# Altium PCB PCB_Akira_f1_2024-01-05.pcbdoc
Units mil, origin at the board's own origin, x right, y up, seen from the top; angles counter-clockwise.
Board outline 6211.95 x 3204.4 mil, 2 copper layers (Top Layer, Bottom Layer); 54 components, 46 nets, 217 pads, 53 vias.
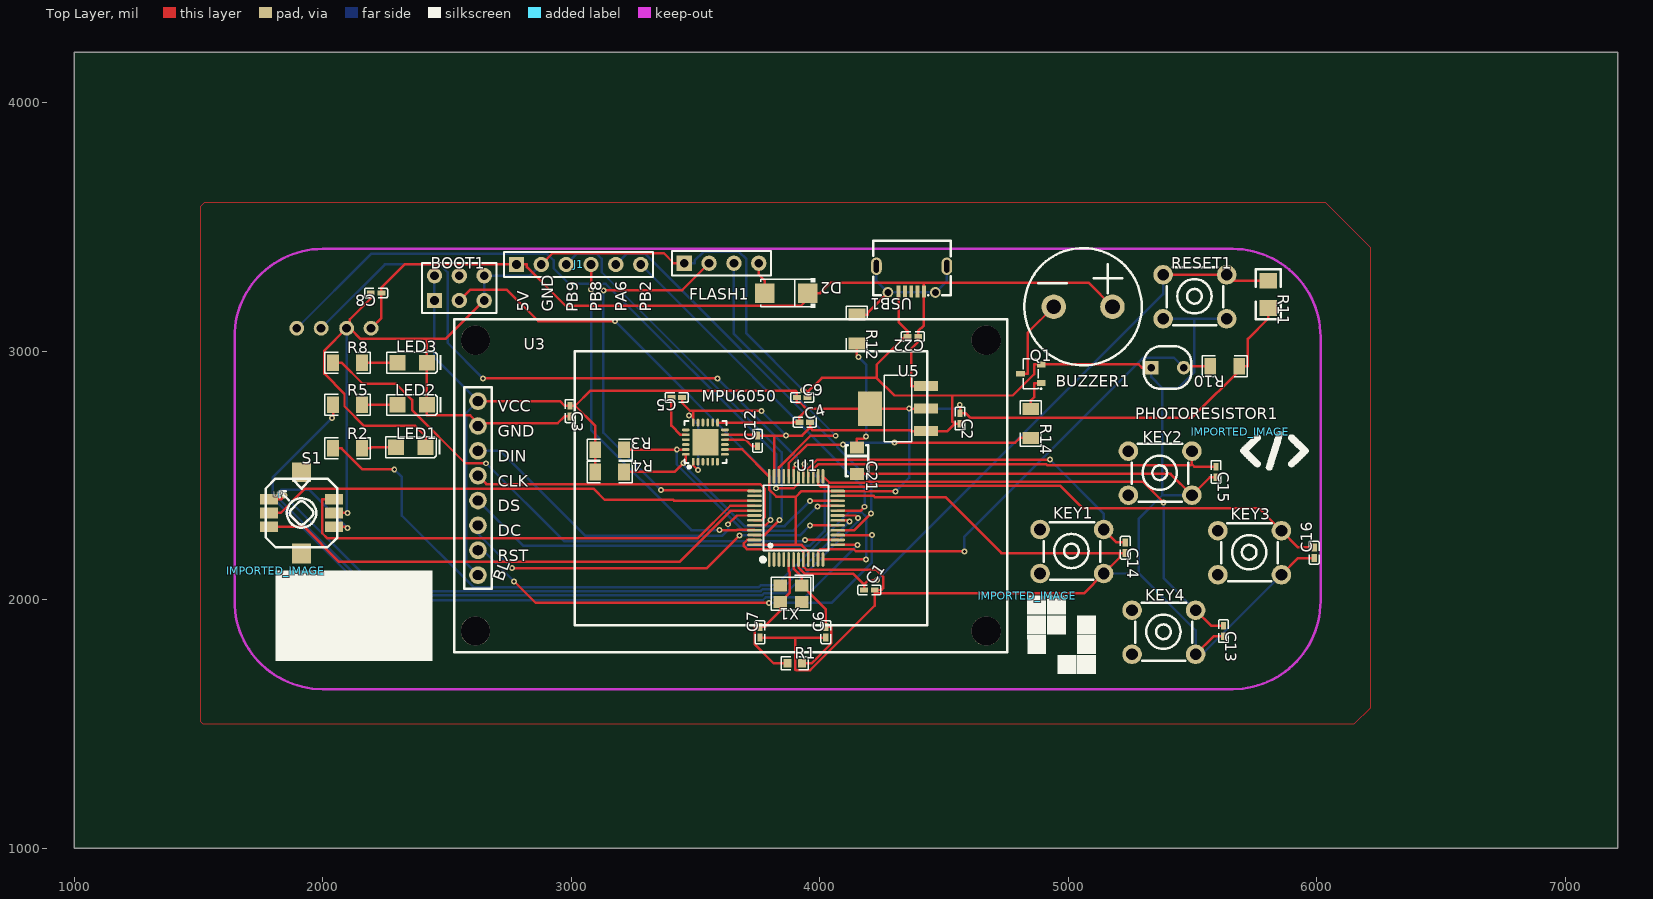
[diagram p0: Top Layer view]
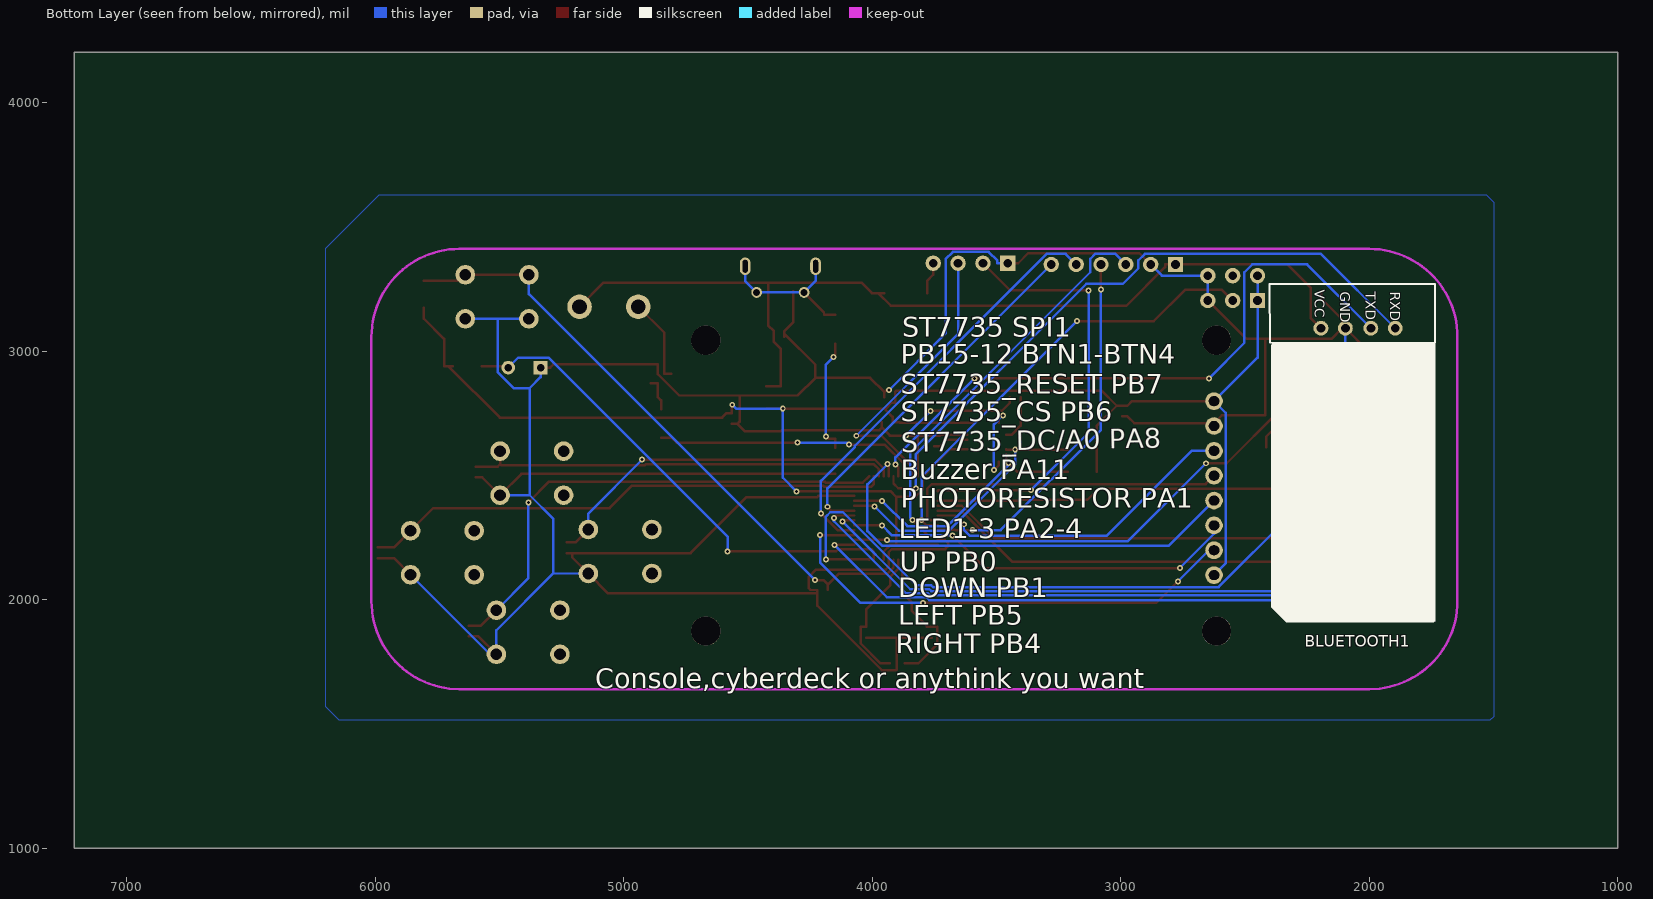
[diagram p1: Bottom Layer view, seen from below]

## Layer stack, top to bottom
Top Layer: signal copper (thickness not stored)
Dielectric: dielectric 12.6, FR-4, Dk 4.8
Bottom Layer: signal copper (thickness not stored)

## Board outline
7211.95,1000 1000,1000 1000,4204.4 7211.95,4204.4

## Components (designator, comment, footprint, x,y, rotation, side; value= is the part's Value field where it differs from the comment)
BLUETOOTH1 "HC06" HC06 1735,3035 r180 bottom
BOOT1 "2.54mm2*3P" HDR-3X2/2.54 2450,3205 r0 top
BUZZER1 "BUZZER" BUZ-TH_BD12.0-P6.00-D0.9-RD 5060,3180 r0 top
C1 "100nF" C0402#1 4200,2040 r0 top
C2 "100nF" C0402#1 4565,2730 r270 top
C3 "100nF" C0402#1 2995,2760 r270 top
C4 "100nF" C0402#1 3940,2715 r0 top
C5 "220nF" C0402#1 3424.99,2814.97 r180 top
C6 "27pF" C0402#1 4025,1870 r90 top
C7 "27pF" C0402#1 3760,1870 r90 top
C8 "10uF" C0402#1 2215,3235 r180 top
C9 "22uF" C0402#1 3930,2815 r0 top
C12 "100nF" C0402#1 3749.99,2639.97 r90 top
C13 "100nF" C0402#1 5625,1875 r270 top
C14 "100nF" C0402#1 5230,2210 r270 top
C15 "100nF" C0402#1 5595,2515 r270 top
C16 "100nF" C0402#1 5990,2190 r90 top
C21 "100nF" C0402#2 4150,2560 r270 top
C22 "100nF" C0402#1 4375,3060 r180 top
D2 "1N4007_C2892673" SMA_L4.3-W2.6-LS5.1-R-RD 3865,3235 r180 top
FLASH1 "Headers  Pins 1*4P" HDR-4X1/2.54 3555,3355 r0 top
IMPORTED_IMAGE "IMPORTED_IMAGE" IMPORTED_IMAGE 1811.5,2116.9 r0 top
IMPORTED_IMAGE "IMPORTED_IMAGE" IMPORTED_IMAGE 5692.25,2677.62 r0 top
IMPORTED_IMAGE "IMPORTED_IMAGE" IMPORTED_IMAGE 4836.16,2016.7 r0 top
J1 "HDR-M-2.54_1x6" HDR-M-2.54_1X6 3030,3350 r0 top
KEY1 "button6*6*8.5" KEY-TH_4P-L6.0-W6.0-P4.50 5015,2195 r0 top
KEY2 "button6*6*8.5" KEY-TH_4P-L6.0-W6.0-P4.50 5370,2510 r0 top
KEY3 "button6*6*8.5" KEY-TH_4P-L6.0-W6.0-P4.50 5730,2190 r0 top
KEY4 "button6*6*8.5" KEY-TH_4P-L6.0-W6.0-P4.50 5385,1870 r0 top
LED1 "11-21/G6C-BQ2R2B/2T" LED1206-RD 2355,2615 r180 top
LED2 "11-21/G6C-BQ2R2B/2T" LED1206-RD 2360,2785 r180 top
LED3 "11-21/G6C-BQ2R2B/2T" LED1206-RD 2360,2955 r180 top
MPU6050 "MPU6050-YJLTY" QFN-24_L4.0-W4.0-P0.50-BL-EP2.7 3540,2635 r0 top
PHOTORESISTOR1 "Photoresistor-5528" SNR2-3.0 5400,2935 r0 top
Q1 "MMBT2222A_C466638" SOT-23-3_L2.9-W1.4-P1.90-LS2.6-BR 4850,2910 r0 top
R1 "1M" R0603 3900,1745 r0 top
R2 "220Ω" R1206 2100,2610 r0 top
R3 "4.7kΩ" R1206 3154.99,2604.97 r180 top
R4 "4.7kΩ" R1206 3154.99,2514.97 r180 top
R5 "220Ω" R1206 2100,2785 r0 top
R8 "220Ω" R1206 2100,2955 r0 top
R10 "100kΩ" R1206 5630,2940 r180 top
R11 "10k" 1206 5805,3230 r270 top
R12 "4.7kΩ" R1206 4150,3090 r270 top
R14 "470Ω" R1206 4850,2710 r270 top
RESET1 "button6*6*8.5" KEY-TH_4P-L6.0-W6.0-P4.50 5510,3220 r0 top
S1 "JOYSTICK_MINI" JOYSTICK_MINI 1915,2350 r0 top
U1 "STM32F103C8T6" LQFP-48_L7.0-W7.0-P0.50-LS9.0-BL 3905,2330 r0 top
U3 "1.8inch LCD TFT ST7735S Waveshare" "1.8 LCD TFT ST7735S WAVESHARE" 2530,1790 r0 top
U5 "LM1117MPX-25NOPB" SOT-223_L6.5-W3.5-P2.30-LS7.0-BR 4315,2770 r0 top
USB1 "USB-111FD-B-SU" USB-SMD_USB-111FD-B-SU 4370,3290 r180 top
X1 "XTAL4-3.2X2.5 8MHz" CRYSTAL-SMD_4P-L3.2-W2.5-BL 3885,2025 r180 top
? "" ? 3820,3156.2 r0 top
? "" ? 5712.47,2530 r0 top

## Footprints (in the part's own frame and the unit in brackets; to place one, negate y for a bottom-side part, rotate by r counter-clockwise, add the part's x,y. Pads: shape width x height; smd on the part's side, far side on the other; paste and mask are expansions set on the pad)
"1.8 LCD TFT ST7735S WAVESHARE" [mm]
  round 1.8 hole 1 slot 1.05 at 0 deg: 1(2.413,7.874) 2(2.413,10.414) 3(2.413,12.954) 4(2.413,15.494) 5(2.413,18.034) 6(2.413,20.574) 7(2.413,23.114) 8(2.413,25.654)
  round 3 hole 3 unplated: ""(2.159,2.159) ""(2.159,31.877) ""(54.356,2.159) ""(54.356,31.877)
  silkscreen extent 0,0 56.5,34
1206 [mil]
  rect 63x70.9 smd: 1(-55,0) 2(55,0)
  silkscreen extent -100,-50 100,50
BUZ-TH_BD12.0-P6.00-D0.9-RD [mm]
  round 2.5 hole 1.5: 1(-3,0) 2(3,0)
  silkscreen extent -5.99,-5.99 5.99,5.99
C0402#1 [mm]
  rect 0.79x0.54 smd: 1(-0.545,0) 2(0.545,0)
  silkscreen extent -1.17,-0.5 1.17,0.5
C0402#2 [mm]
  rect 1.2x1.4 smd: 1(-1.35,0) 2(1.35,0)
  silkscreen extent -1.6,-1.14 1.6,1.14
CRYSTAL-SMD_4P-L3.2-W2.5-BL [mm]
  rect 1.4x1.2 smd: 1(-1.1,-0.85) 2(1.1,-0.85) 3(1.1,0.85) 4(-1.1,0.85)
  silkscreen extent -2.26,-1.91 2.03,1.68
HC06 [mil]
  round 60 hole 36: 1(-460,58.4) 2(-361.6,58.4) 3(-259.2,58.4) 4(-160.8,58.4)
  silkscreen extent -666,0 0,236
HDR-3X2/2.54 [mil]
  rect 62x62 hole 35: 1(0,0)
  round 62 hole 35: 2(0,100) 3(100,0) 4(100,100) 5(200,0) 6(200,100)
  silkscreen extent -50,-50 250,150
HDR-4X1/2.54 [mil]
  rect 62x62 hole 35: 1(-100,0)
  round 62 hole 35: 2(0,0) 3(100,0) 4(200,0)
  silkscreen extent -150,-50 250,50
HDR-M-2.54_1X6 [mil]
  rect 62x62 hole 35: 1(-250,0)
  round 62 hole 35: 2(-150,0) 3(-50,0) 4(50,0) 5(150,0) 6(250,0)
  silkscreen extent -300,-50 300,50
IMPORTED_IMAGE [mil]
  silkscreen extent 0,-361 630,0
JOYSTICK_MINI [mil]
  rect 72.8x43.3 smd: A(-131,55) B(131,55) C(-131,-55) CTR(-131,0) D(131,-55) GND(131,0)
  rect 74.8x78.7 smd: NC(0,163) NC@0(0,-163)
  silkscreen extent -144,-138 144,138
KEY-TH_4P-L6.0-W6.0-P4.50 [mm]
  round 2 hole 1.2: 1(-3.25,-2.25) 2(3.25,-2.25) 3(3.25,2.25) 4(-3.25,2.25)
  silkscreen extent -2.9,-2.9 2.9,3
LED1206-RD [mm]
  rect 1.635x1.6 smd: 1(-1.517,0) 2(1.517,0)
  silkscreen extent -2.99,-1.04 2.57,1.07
LQFP-48_L7.0-W7.0-P0.50-LS9.0-BL [mm]
  oval 0.27x1.5 smd: 1(-2.75,-4.25) 2(-2.25,-4.25) 3(-1.75,-4.25) 4(-1.25,-4.25) 5(-0.75,-4.25) 6(-0.25,-4.25) 7(0.25,-4.25) 8(0.75,-4.25) 9(1.25,-4.25) 10(1.75,-4.25) 11(2.25,-4.25) 12(2.75,-4.25) 25(2.75,4.25) 26(2.25,4.25) 27(1.75,4.25) 28(1.25,4.25) 29(0.75,4.25) 30(0.25,4.25) 31(-0.25,4.25) 32(-0.75,4.25) 33(-1.25,4.25) 34(-1.75,4.25) 35(-2.25,4.25) 36(-2.75,4.25)
  oval 1.5x0.27 smd: 13(4.25,-2.75) 14(4.25,-2.25) 15(4.25,-1.75) 16(4.25,-1.25) 17(4.25,-0.75) 18(4.25,-0.25) 19(4.25,0.25) 20(4.25,0.75) 21(4.25,1.25) 22(4.25,1.75) 23(4.25,2.25) 24(4.25,2.75) 37(-4.25,2.75) 38(-4.25,2.25) 39(-4.25,1.75) 40(-4.25,1.25) 41(-4.25,0.75) 42(-4.25,0.25) 43(-4.25,-0.25) 44(-4.25,-0.75) 45(-4.25,-1.25) 46(-4.25,-1.75) 47(-4.25,-2.25) 48(-4.25,-2.75)
  silkscreen extent -3.59,-4.46 3.3,3.34
QFN-24_L4.0-W4.0-P0.50-BL-EP2.7 [mm]
  oval 0.28x0.8 smd: 1(-1.25,-2) 2(-0.75,-2) 3(-0.25,-2) 4(0.25,-2) 5(0.75,-2) 6(1.25,-2) 13(1.25,2) 14(0.75,2) 15(0.25,2) 16(-0.25,2) 17(-0.75,2) 18(-1.242,2)
  oval 0.8x0.28 smd: 7(2,-1.25) 8(2,-0.75) 9(2,-0.25) 10(2,0.25) 11(2,0.75) 12(2,1.25) 19(-2,1.25) 20(-2,0.75) 21(-2,0.25) 22(-2,-0.25) 23(-2,-0.75) 24(-2,-1.25)
  rect 2.7x2.7 smd: 25(0.012,0)
  silkscreen extent -2.14,-2.79 2.16,2.15
R0603 [mil]
  rect 31.75x34.02 smd: 1(-29.66,0) 2(29.66,0)
  silkscreen extent -55,-26 55,26
R1206 [mil]
  rect 47.54x66.97 smd: 1(-58.22,0) 2(58.22,0)
  silkscreen extent -91,-42 91,42
SMA_L4.3-W2.6-LS5.1-R-RD [mm]
  rect 2x2 smd: 1(2.2,0) 2(-2.2,0)
  silkscreen extent -2.98,-1.5 2.6,1.5
SNR2-3.0 [mil]
  rect 55x55 hole 30: 1(-65,0)
  round 55 hole 30: 2(65,0)
  silkscreen extent -96,-86 96,86
SOT-23-3_L2.9-W1.4-P1.90-LS2.6-BR [mm]
  rect 0.91x0.6 smd: 1(1.055,-0.955) 2(1.055,0.955) 3(-1.055,0)
  silkscreen extent -0.78,-1.6 1.09,1.53
SOT-223_L6.5-W3.5-P2.30-LS7.0-BR [mm]
  rect 2.465x1.05 smd: 1(2.857,-2.3) 2(2.857,0) 3(2.857,2.3)
  rect 2.465x3.54 smd: 4(-2.857,0)
  silkscreen extent -1.4,-3.4 1.4,3.4
USB-SMD_USB-111FD-B-SU [mm]
  rect 0.4x1.25 smd: 1(-1.265,1.234) 2(-0.615,1.234) 3(0.036,1.234) 4(0.686,1.234) 5(1.336,1.234)
  round 1.1 hole 0.7: 6(2.425,1.335) 7(-2.425,1.335)
  oval 1.1x1.8 hole 0.5 slot 1.3 at 90 deg: 8(3.601,-1.335) 9(-3.6,-1.335)
  silkscreen extent -4,-3.96 3.9,1.63
? [mil]

## Via types
v1: diameter 24, hole 12, Top Layer to Bottom Layer, tented both sides, 53 vias

## Nets (pads, with @x,y where several pads share a name; then routed paths per layer and width w, separated by ;. In a path a pad name is that pad's centre, name@x,y a point inside that pad or via, vN(x,y) a via of type N, cw(c..) or ccw(c..) an arc to the next point about the centre after c; other vN are vias at no path point)
3.3V: BOOT1.1 BOOT1.2 C2.1 C3.1 C4.1 C9.1 MPU6050.8 MPU6050.13 R3.2 R4.2 R10.1 R11.2 U1.9 U1.24 U1.36 U1.48 U3.1 U3.8 U5.2 U5.4 | length 7300.1
  Top Layer w10: U3.8 2954.82,2800 2973.36,2781.46 C3.1 3016.64,2781.46 ; R4.2 R3.2 3096.77,2701.33 3016.64,2781.46 ; MPU6050.13 3890.72,2713.74 3891.98,2715 C4.1 3918.54,2736.64 3945.4,2763.5 3945.4,2770 ; MPU6050.8 3688.58,2605.47 U1.36 3796.73,2444.46 3825.88,2415.31 3904.11,2415.31 ; U1.48 3904.11,2221.73 ; U1.9 3954.21,2194.97 3927.45,2221.73 3904.11,2221.73 ; v1(4305.44,2436.91) 4304.08,2438.27 U1.24 3927.07,2438.27 3904.11,2415.31 ; U5.2 v1(4360.44,2770) U5.4 3945.4,2770 ; v1(4563.71,2785.45) 4565,2784.16 C2.1 4586.64,2751.46 4604.71,2733.39 5499,2733.39 R10.1@5705.61,2940 ; R10.1 R10.1@5705.61,2940 ; R11.2 5805,3132.49 5723,3050.49 5723,2940 R10.1@5705.61,2940 ; 3016.64,2781.46 3077.52,2842.34 3902.84,2842.34 3908.54,2836.64 C9.1 3908.54,2793.36 3922.04,2793.36 3945.4,2770 ; 3904.11,2221.73 3904.11,2415.31
  Bottom Layer w10: BOOT1.2 BOOT1.1 2450,2975 U3.8 2578.18,2753.18 2578.18,2146.82 U3.1 ; v1(4305.44,2436.91) 4360.44,2491.91 v1(4360.44,2770) 4548.26,2770 v1(4563.71,2785.45)
5V: BLUETOOTH1.1 BUZZER1.2 C8.1 C22.1 D2.2 J1.1 U5.3 USB1.1 | length 3837.2
  Top Layer w10: BLUETOOTH1.1 2236.46,3134.86 C8.1 2236.46,3256.64 2329.82,3350 J1.1 2822.01,3350 2822.01,3339.5 2977.65,3183.86 3925.66,3183.86 D2.2@3976.8,3235 ; D2.2 D2.2@3976.8,3235 ; U5.3 4367.97,2860.55 4367.97,3009.87 4396.46,3038.36 C22.1 4396.46,3081.64 4419.8,3104.98 USB1.1 4419.8,3277.01 ; BUZZER1.2 5081.1,3277.01 4419.8,3277.01 ; D2.2@3976.8,3235 4001.99,3235 4044.05,3277.06 4419.75,3277.06 4419.8,3277.01
BOOT0: BOOT1.3 U1.44 | length 1830.2
  Top Layer w10: BOOT1.3 2592.99,3247.99 2741.46,3247.99 2867.79,3121.66 v1(3176.05,3121.66) ; U1.44 3782.02,2300.47 v1(3803.09,2321.54)
  Bottom Layer w10: v1(3176.05,3121.66) 3801.32,2496.39 3801.32,2323.31 v1(3803.09,2321.54)
BUTTON1: C14.1 KEY1.3 U1.28 | length 1497.2
  Top Layer w10: U1.28 3954.21,2528.74 3989.72,2564.25 v1(4926.18,2564.25) ; KEY1.3@5142.95,2283.58 5195.07,2231.46 C14.1
  Bottom Layer w10: v1(4926.18,2564.25) 5142.95,2347.48 KEY1.3@5142.95,2283.58
BUTTON2: C15.1 KEY2.3 U1.27 | length 1718.3
  Top Layer w10: U1.27 3973.9,2525.73 3993.98,2545.81 4912.02,2545.81 4916.63,2541.2 5493.34,2541.2 5497.95,2545.81 ; KEY2.3@5497.95,2598.58 5497.95,2545.81 ; C15.1 5507.3,2536.46 5497.95,2545.81
BUTTON3: C16.2 KEY3.3 U1.26 | length 2136.7
  Top Layer w10: U1.26 3993.58,2466.61 4004.96,2455.23 4193.05,2455.23 4197.78,2459.96 4966.59,2459.96 5056.86,2369.69 5766.84,2369.69 5857.95,2278.58 5925.07,2211.46 C16.2
BUTTON4: C13.1 KEY4.3 U1.25 | length 2042.6
  Top Layer w10: U1.25 4038.41,2472.18 4187.3,2472.18 4191.13,2476.01 5300.84,2476.01 v1(5383.9,2392.95) ; KEY4.3@5512.95,1958.58 5575.07,1896.46 C13.1
  Bottom Layer w10: v1(5383.9,2392.95) 5383.9,2087.63 KEY4.3@5512.95,1958.58
BUZZER: R14.2 U1.32 | length 1069.6
  Top Layer w10: U1.32 3875.47,2550.33 3950.6,2625.46 v1(4093.61,2625.46) ; v1(4300.78,2632.73) 4786.46,2632.73 4805.51,2651.78 R14.2
  Bottom Layer w10: v1(4093.61,2625.46) 4100.88,2632.73 v1(4300.78,2632.73)
BUZZER1_1: BUZZER1.1 Q1.3 | length 342.2
  Top Layer w10: Q1.3 4837.38,2910 4837.38,3075.49 BUZZER1.1
C21_1: C21.1 R12.2 | length 464.5
  Top Layer w10: C21.1 4150,2647.79 4176.31,2647.79 v1(4186.78,2658.26) ; R12.2 4150,2983.77 v1(4155.47,2978.3)
  Bottom Layer w10: v1(4155.47,2978.3) 4186.78,2946.99 v1(4186.78,2658.26)
CTR: S1.CTR U1.39 | length 2014.5
  Top Layer w10: S1.CTR 1831.41,2350 1929.31,2447.9 3089.79,2447.9 3135.11,2402.58 3410.68,2402.58 3414.36,2398.9 U1.39
D2_1: D2.1 FLASH1.4 | length 129.7
  Top Layer w10: FLASH1.4 3755,3308.77 3778.39,3285.38 D2.1
DOWN: S1.D U1.19 | length 3142.9
  Top Layer w10: S1.D 2094.81,2295 v1(2100.65,2289.16) ; U1.19 4144.38,2339.84 v1(4155.17,2329.05)
  Bottom Layer w10: v1(2100.65,2289.16) 1947.22,2442.59 1833.45,2442.59 1822.81,2431.95 1822.81,2409.14 2213.96,2017.99 3767.52,2017.99 3776.6,2027.07 3864.59,2027.07 4155.17,2317.65 v1(4155.17,2329.05)
GND: BLUETOOTH1.2 BOOT1.5 BOOT1.6 C1.2 C2.2 C3.2 C4.2 C5.1 C6.1 C7.1 C8.2 C9.2 C12.2 C13.2 C14.2 C15.2 C16.1 C21.2 C22.2 FLASH1.1 J1.2 KEY1.2 KEY2.2 KEY3.2 KEY4.2 LED1.1 LED2.1 LED3.1 MPU6050.1 MPU6050.11 MPU6050.18 PHOTORESISTOR1.1 Q1.2 RESET1.1 RESET1.2 S1.GND U1.8 U1.23 U1.35 U1.47 U3.7 U5.1 USB1.5 | length 17775.1
  Top Layer w10: S1.GND v1(2100.84,2350) ; C8.2 2193.54,3213.36 2109.52,3129.34 BLUETOOTH1.2@2109.52,3093.4 ; LED1.1 2414.74,2657.51 2372.24,2700.01 2167.23,2700.01 2087.95,2779.29 2087.95,2829.47 2006.95,2910.47 2006.95,3003.75 BLUETOOTH1.2 BLUETOOTH1.2@2109.52,3093.4 ; U3.7 U3.7@2625,2711.4 ; BOOT1.5 2495.07,3050.07 2419.74,3050.07 ; J1.2 2924.94,3394.94 3373.05,3394.94 3412.99,3355 FLASH1.1 ; C3.2 2973.36,2738.54 2946.22,2711.4 U3.7@2625,2711.4 ; C5.1 3446.45,2809.35 3446.45,2808.15 3446.45,2793.33 3478.59,2761.19 3491.1,2761.19 ; v1(3475.12,2741.71) 3491.1,2741.71 ; MPU6050.1 3490.79,2542.16 v1(3510.77,2522.18) ; MPU6050.18 3491.1,2741.71 ; MPU6050.11 3725.25,2664.53 3728.35,2661.43 3739.17,2661.43 C12.2 3816.42,2661.43 ; U1.47 3708.51,2241.42 3695.27,2228.18 3695.27,2216.76 3707.56,2204.47 3922.01,2204.47 3934.53,2191.95 U1.8 3934.53,2133.53 3946,2122.06 4226.39,2122.06 4255.28,2093.17 4255.28,2047.26 4248.02,2040 C1.2 4221.46,2035.05 4221.46,2026.71 ; C7.1 3902.72,1848.54 ; v1(3766.26,2761.19) 3491.1,2761.19 ; U1.35 3816.42,2661.43 ; v1(3933.27,2843.92) 3944.18,2843.92 3951.46,2836.64 ; C9.2 3951.46,2836.64 ; C4.2 3961.46,2704.18 3961.46,2693.36 ; C6.1 3902.72,1848.54 ; U1.23 4217,2418.58 4221.72,2413.86 4506.14,2413.86 4731.46,2188.54 5208.36,2188.54 ; C21.2 5412.52,2506.85 5497.95,2421.42 5570.07,2493.54 C15.2 ; USB1.5 4317.4,3117.78 4353.54,3081.64 4353.54,3070.82 ; C22.2 4353.54,3070.82 ; C2.2 4543.36,2708.54 ; C14.2 5208.36,2188.54 ; PHOTORESISTOR1.1 5296.49,2935 5283.89,2947.6 Q1.2 4862.62,2947.6 4862.62,2908.37 4776.92,2822.67 4534.1,2822.67 ; KEY4.2@5512.95,1781.42 5585.07,1853.54 C13.2 ; KEY3.2@5857.95,2101.42 5925.07,2168.54 C16.1 ; BLUETOOTH1.2@2109.52,3093.4 2152.85,3050.07 2419.74,3050.07 ; 2419.74,3050.07 LED3.1 LED2.1 2419.74,2742.5 2593.9,2742.5 U3.7@2625,2711.4 ; 3491.1,2741.71 3491.1,2761.19 ; 3816.42,2661.43 v1(3864.29,2661.43) 3929.53,2661.43 3961.46,2693.36 ; 3902.72,1848.54 3902.72,1719.85 3905.63,1716.94 3961.56,1716.94 4221.46,1976.84 4221.46,2026.71 ; 3951.46,2836.64 4008.67,2893.85 4229.24,2893.85 ; 3961.46,2693.36 3971.03,2683.79 4363.63,2683.79 4367.97,2679.45 U5.1 4514.27,2679.45 4543.36,2708.54 ; 4221.46,2026.71 5063.24,2026.71 5142.95,2106.42 5208.36,2171.83 5208.36,2188.54 ; 4229.24,2893.85 4229.24,2946.52 4353.54,3070.82 ; 4229.24,2893.85 4300.42,2822.67 4534.1,2822.67 ; 4534.1,2822.67 4534.1,2717.8 4543.36,2708.54
  Bottom Layer w10: BLUETOOTH1.2 2096.6,2354.24 v1(2100.84,2350) ; BOOT1.5 BOOT1.6 2835,3305 J1.2 ; FLASH1.1 3497.01,3355 3497.01,3365.5 3532.16,3400.65 3675.74,3400.65 3705,3371.39 3705,3072.19 v1(3933.27,2843.92) ; v1(3475.12,2741.71) 3510.77,2706.06 v1(3510.77,2522.18) ; v1(3766.26,2761.19) 3766.26,2759.46 v1(3864.29,2661.43) ; KEY1.2@5142.95,2106.42 5284.46,2106.42 ; PHOTORESISTOR1.1 5335,2896.49 5378.71,2852.78 ; RESET1.1 5508.24,3131.42 ; KEY2.2@5497.95,2421.42 5378.71,2421.42 ; RESET1.2@5637.95,3131.42 5508.24,3131.42 ; KEY3.2@5857.95,2101.42 5537.95,1781.42 5512.95,1781.42 5512.95,1877.93 5284.46,2106.42 ; 5284.46,2106.42 5284.46,2327.17 5378.71,2421.42 ; 5378.71,2421.42 5378.71,2852.78 ; 5378.71,2852.78 5443.48,2852.78 5508.24,2917.54 5508.24,3131.42
I2C2_SCL: MPU6050.23 R3.1 U1.21 | length 1107.3
  Top Layer w10: R3.1 3247.99,2604.97 v1(3424.99,2604.97) 3460.76,2604.97 MPU6050.23 ; v1(3990.38,2375.53) 3994.06,2379.21 U1.21
  Bottom Layer w10: v1(3424.99,2604.97) 3424.99,2545.23 3691.47,2278.75 3893.6,2278.75 v1(3990.38,2375.53)
I2C2_SDA: MPU6050.24 R4.1 U1.22 | length 1064.5
  Top Layer w10: R4.1 3247.99,2514.97 3416.24,2514.97 v1(3452.25,2550.98) 3461.26,2559.99 MPU6050.24 ; v1(3960.5,2398.9) U1.22
  Bottom Layer w10: v1(3452.25,2550.98) 3452.25,2542.93 3697.98,2297.2 3858.8,2297.2 v1(3960.5,2398.9)
LED1: R2.1 U1.12 | length 2945.4
  Top Layer w10: R2.1 2076.56,2610 2161.2,2525.36 v1(2288.22,2525.36) ; U1.12 4013.86,2163.27 v1(4186.78,2163.27)
  Bottom Layer w10: v1(2288.22,2525.36) 2319.27,2494.31 ; 2319.28,2494.31 2319.28,2338.69 2606.62,2051.35 3755.48,2051.35 3763.3,2059.17 3824.5,2059.17 4118.05,2352.72 4169.35,2352.72 4186.78,2335.29 v1(4186.78,2163.27)
LED2: R5.1 U1.13 | length 3170
  Top Layer w10: v1(2037.26,2732.05) 2037.26,2735.99 2041.78,2740.51 R5.1 ; U1.13 v1(4151.78,2221.73)
  Bottom Layer w10: v1(2037.26,2732.05) 1799.49,2494.28 1799.49,2409.51 2210.12,1998.88 3771.11,1998.88 3783.25,2011.02 3941.07,2011.02 v1(4151.78,2221.73)
LED3: R8.1 U1.14 | length 2354.1
  Top Layer w10: R8.1 2076.56,2955 2161.55,2870.01 2294.87,2870.01 2360.01,2804.87 2360.01,2763.75 2573.76,2550 v1(2657.91,2550) ; v1(3941.34,2241.42) U1.14
  Bottom Layer w10: v1(2657.91,2550) 2971.25,2236.66 3936.58,2236.66 v1(3941.34,2241.42)
LEFT: S1.C U1.41 | length 2098.1
  Top Layer w10: S1.C 1924.46,2295 2066.55,2152.91 3436.79,2152.91 3643.41,2359.53 U1.41
NRST: C1.1 R11.1 RESET1.3 RESET1.4 U1.7 | length 2544.5
  Top Layer w10: U1.7 3914.84,2130.51 3940.67,2104.68 4135.5,2104.68 4178.54,2061.64 ; C1.1 4178.54,2061.64 ; v1(4231.29,2079.75) 4196.65,2079.75 4178.54,2061.64 ; RESET1.4 5637.95,3308.58 5661.53,3285 R11.1
  Bottom Layer w10: v1(4231.29,2079.75) 5382.05,3230.51 RESET1.4
OSC_IN: C7.2 R1.1 U1.5 X1.3 | length 590.7
  Top Layer w10: R1.1 3815.41,1745 3738.31,1822.1 3738.31,1891.41 3738.36,1891.46 C7.2 3781.64,1891.46 3781.64,1896.85 3841.69,1956.9 X1.3 3880.31,2030.15 3880.31,2111.43 3875.47,2116.27 U1.5
OSC_OUT: C6.2 R1.2 U1.6 X1.1 | length 563.4
  Top Layer w10: U1.6 3895.16,2126.24 3928.31,2093.09 X1.1 4025,1961.77 C6.2 4046.64,1891.46 4046.69,1891.41 4046.69,1824.84 3966.85,1745 R1.2
PA6: J1.5 U1.16 | length 1719
  Top Layer w10: U1.16 4139.52,2280.79 v1(4207.12,2348.39)
  Bottom Layer w10: J1.5 3222.14,3392.14 3298.78,3392.14 4070.56,2620.36 4070.56,2615.91 4207.12,2479.35 v1(4207.12,2348.39)
PB2: J1.6 U1.20 | length 1463.4
  Top Layer w10: U1.20 4165.64,2359.53 v1(4181.11,2375)
  Bottom Layer w10: J1.6 4181.11,2448.89 v1(4181.11,2375)
PB8: J1.4 U1.45 | length 1492.1
  Top Layer w10: v1(3080,3248.68) J1.4 ; v1(3597.45,2280.79) 3666.38,2280.79 3668.35,2282.76 3735.71,2282.76 U1.45
  Bottom Layer w10: v1(3080,3248.68) 3080,2684.32 3483.53,2280.79 v1(3597.45,2280.79)
PB9: J1.3 U1.46 | length 1650.4
  Top Layer w10: U1.46 3778.52,2261.1 v1(3838.71,2321.29)
  Bottom Layer w10: J1.3 3023.5,3393.5 3101.75,3393.5 3122.96,3372.29 3122.96,3318.45 3847.42,2593.99 3847.42,2330 v1(3838.71,2321.29)
PHOTORESISTOR: PHOTORESISTOR1.2 R10.2 U1.11 | length 1993.6
  Top Layer w10: U1.11 3993.58,2194 4004.05,2204.47 4136.44,2204.47 4145.07,2195.84 v1(4582.42,2195.84) ; PHOTORESISTOR1.2 5470,2940 R10.2
  Bottom Layer w10: v1(4582.42,2195.84) 4582.42,2254.97 5302.63,2975.18 5424.82,2975.18 PHOTORESISTOR1.2
Q1_1: Q1.1 R14.1 | length 138.3
  Top Layer w10: R14.1 4850,2803 4862.62,2815.62 4862.62,2872.4 Q1.1
R2_2: LED1.2 R2.2 | length 139.1
  Top Layer w10: R2.2 2193,2610 2198,2615 LED1.2
R5_2: LED2.2 R5.2 | length 142
  Top Layer w10: R5.2 LED2.2
R8_2: LED3.2 R8.2 | length 142
  Top Layer w10: R8.2 LED3.2
R12_1: R12.1 USB1.6 USB1.7 USB1.8 USB1.9 | length 606.4
  Top Layer w10: R12.1 4194.49,3148.22 4194.49,3157.4 USB1.6
  Bottom Layer w10: USB1.8@4228.27,3342.56 4228.27,3283.7 USB1.6 USB1.7 4511.73,3283.7 USB1.9
RIGHT: S1.B U1.40 | length 1985.5
  Top Layer w10: S1.B 1998.59,2405 1998.54,2404.95 1998.54,2268.38 2018.33,2248.59 3509.77,2248.59 3640.39,2379.21 U1.40
RX: BLUETOOTH1.3 U1.31 | length 2588.2
  Top Layer w10: v1(2645.67,2891.69) v1(3588.99,2891.69) ; U1.31 3895.16,2533.51 v1(3906.87,2545.22)
  Bottom Layer w10: BLUETOOTH1.3 2250.85,3350.05 2471.36,3350.05 2503.32,3318.09 2503.32,3034.04 v1(2645.67,2891.69) ; v1(3588.99,2891.69) 3906.87,2573.81 v1(3906.87,2545.22)
SPI1_MOSI: U1.17 U3.3 | length 1609.5
  Top Layer w10: v1(2762.86,2128.39) 3546.58,2128.39 v1(3677.9,2259.71) ; v1(3960.93,2300.47) U1.17
  Bottom Layer w10: U3.3 2625,2266.25 v1(2762.86,2128.39) ; v1(3677.9,2259.71) 3920.17,2259.71 v1(3960.93,2300.47)
SPI1_SCK: U1.15 U3.2 | length 1988.9
  Top Layer w10: v1(2770.84,2074.63) 2857.5,1987.97 v1(3795.37,1987.97) ; U1.15 v1(4210.29,2261.1)
  Bottom Layer w10: U3.2 2645.47,2200 v1(2770.84,2074.63) ; v1(3795.37,1987.97) 4047.56,1987.97 4210.29,2150.7 v1(4210.29,2261.1)
ST7735_CS: U1.42 U3.6 | length 1301.9
  Top Layer w10: v1(3631.32,2304.54) 3666.62,2339.84 U1.42
  Bottom Layer w10: U3.6 2715.44,2600 3057.96,2257.48 3606.79,2257.48 3631.32,2282.01 v1(3631.32,2304.54)
ST7735_DC/A0: U1.29 U3.4 | length 1848.3
  Top Layer w10: U1.29 3934.53,2542.46 v1(3938.23,2546.16)
  Bottom Layer w10: U3.4 2807.77,2217.23 3959.85,2217.23 4019.6,2276.98 4019.6,2464.79 v1(3938.23,2546.16)
ST7735_RESET: U1.43 U3.5 | length 1337.7
  Top Layer w10: U3.5 2658.69,2466.31 3760.99,2466.31 3779.71,2447.59 3779.71,2334.04 3765.83,2320.16 U1.43
SWCLK: FLASH1.2 U1.37 | length 1748.2
  Top Layer w10: v1(3130,3246.11) 3446.11,3246.11 FLASH1.2 ; v1(3361.23,2441.68) 3734.27,2441.68 U1.37
  Bottom Layer w10: v1(3130,3246.11) 3130,2672.91 v1(3361.23,2441.68)
SWDIO: FLASH1.3 U1.34 | length 1181.5
  Top Layer w10: U1.34 3836.1,2533.66 3963.18,2660.74 v1(4064.68,2660.74)
  Bottom Layer w10: FLASH1.3 3655,3070.42 v1(4064.68,2660.74)
TX: BLUETOOTH1.4 U1.30 | length 2669.8
  Top Layer w10: v1(3824.37,2449.42) 3895.87,2449.42 3914.84,2468.39 U1.30
  Bottom Layer w10: BLUETOOTH1.4 2195.11,3392.71 2903.6,3392.71 2930,3366.31 2930,3334.28 2992.18,3272.1 3139.17,3272.1 3824.37,2586.9 v1(3824.37,2449.42)
U4_10: C12.1 MPU6050.10 | length 142.2
  Top Layer w10: MPU6050.10 3702.02,2644.84 3728.35,2618.51 C12.1
U4_20: C5.2 MPU6050.20 | length 186.5
  Top Layer w10: C5.2 3403.53,2701.55 3440.55,2664.53 MPU6050.20
UP: S1.A U1.18 | length 2667.4
  Top Layer w10: S1.A 1832.23,2405 v1(1846.66,2419.43) ; U1.18 4116.16,2320.16 v1(4120.31,2316.01)
  Bottom Layer w10: v1(1846.66,2419.43) 2230.8,2035.29 3762.12,2035.29 3769.95,2043.12 3847.42,2043.12 v1(4120.31,2316.01)
pads on no net: BOOT1.4 KEY1.1 KEY1.4 KEY2.1 KEY2.4 KEY3.1 KEY3.4 KEY4.1 KEY4.4 MPU6050.2 MPU6050.3 MPU6050.4 MPU6050.5 MPU6050.6 MPU6050.7 MPU6050.9 MPU6050.12 MPU6050.14 MPU6050.15 MPU6050.16 MPU6050.17 MPU6050.19 MPU6050.21 MPU6050.22 MPU6050.25 S1.NC S1.NC@0 U1.1 U1.2 U1.3 U1.4 U1.10 U1.33 U1.38 U3. USB1.2 USB1.3 USB1.4 X1.2 X1.4

## Polygon pours and split planes (outlines as drawn)
GND on Top Layer (solid): 6215,1565 6150,1500 1520,1500 1510,1510 1510,3585 1525,3600 6035,3600 6215,3420 6215,1565
GND on Bottom Layer (solid): 1500,3600 1500,1530 1515,1515 6145,1515 6200,1570 6200,3415 5985,3630 1530,3630 1500,3600

## Keep-outs
Keep-Out Layer:
  lines w10: 1645.59,1995.39 ccw(c1999.92,1995.39) 1999.92,1641.06 ; 1645.59,3058.38 cw(c1999.92,3058.38) 1999.92,3412.71 ; 5661.33,1641.06 ccw(c5661.33,1995.39) 6015.66,1995.39 ; 5661.33,3412.71 cw(c5661.33,3058.38) 6015.66,3058.38

## Silkscreen, mask and mechanical layers (free items; w line width, h text height)
Top Overlay:
  text "5V" at 2828.62,3158.71 h47.24 r90
  text "GND" at 2928.62,3158.71 h47.24 r90
  text "PB8" at 3123.62,3158.71 h47.24 r90
  text "PA6" at 3223.62,3158.71 h47.24 r90
  text "PB2" at 3321.4,3158.71 h47.24 r90
  text "PB9" at 3026.4,3158.3 h47.24 r89
Bottom Overlay:
  region: 1735,3030 1735,1915 1740,1910 2335,1910 2395,1970 2395,3025 2390,3030
  text "ST7735 SPI1" at 3880,3060 h80
  text "PB15-12 BTN1-BTN4" at 3885,2950 h80
  text "ST7735_RESET PB7" at 3885,2830 h80
  text "ST7735_CS PB6" at 3885,2720 h80
  text "ST7735_DC/A0 PA8" at 3884.3,2595.01 h80 r359
  text "Buzzer PA11" at 3885,2485 h80
  text "PHOTORESISTOR PA1" at 3885,2370 h80
  text "LED1-3 PA2-4" at 3892.95,2248.58 h80
  text "UP PB0" at 3890,2115 h80
  text "DOWN PB1" at 3895,2010 h80
  text "LEFT PB5" at 3895,1900 h80
  text "RIGHT PB4" at 3905,1785 h80
  text "Console,cyberdeck or anythink you want" at 5115,1645 h80

## Text inside footprints (layer, text, board x,y; h text height)
BLUETOOTH1: Bottom Overlay "RXD" at 1916.09,3239.7 h39.37 r90; Bottom Overlay "TXD" at 2014.48,3239.7 h39.37 r90; Bottom Overlay "GND" at 2117.09,3240.3 h39.37 r90; Bottom Overlay "VCC" at 2219.28,3247.6 h39.37 r90
S1: Document "UP" at 1801,2415 h20; Top Overlay "UP" at 1801,2415 h20
U3: Top Overlay "VCC" at 2705,2756.38 h47.24; Top Overlay "GND" at 2705,2656.38 h47.24; Top Overlay "DIN" at 2705,2556.38 h47.24; Top Overlay "CLK" at 2705,2456.38 h47.24; Top Overlay "DS" at 2705,2356.38 h47.24; Top Overlay "DC" at 2705,2256.38 h47.24; Top Overlay "RST" at 2705,2156.38 h47.24; Top Overlay "BL" at 2727.05,2071.53 h47.24 r69